# EAGLE board ctia_alone (EAGLE 7.2.0)
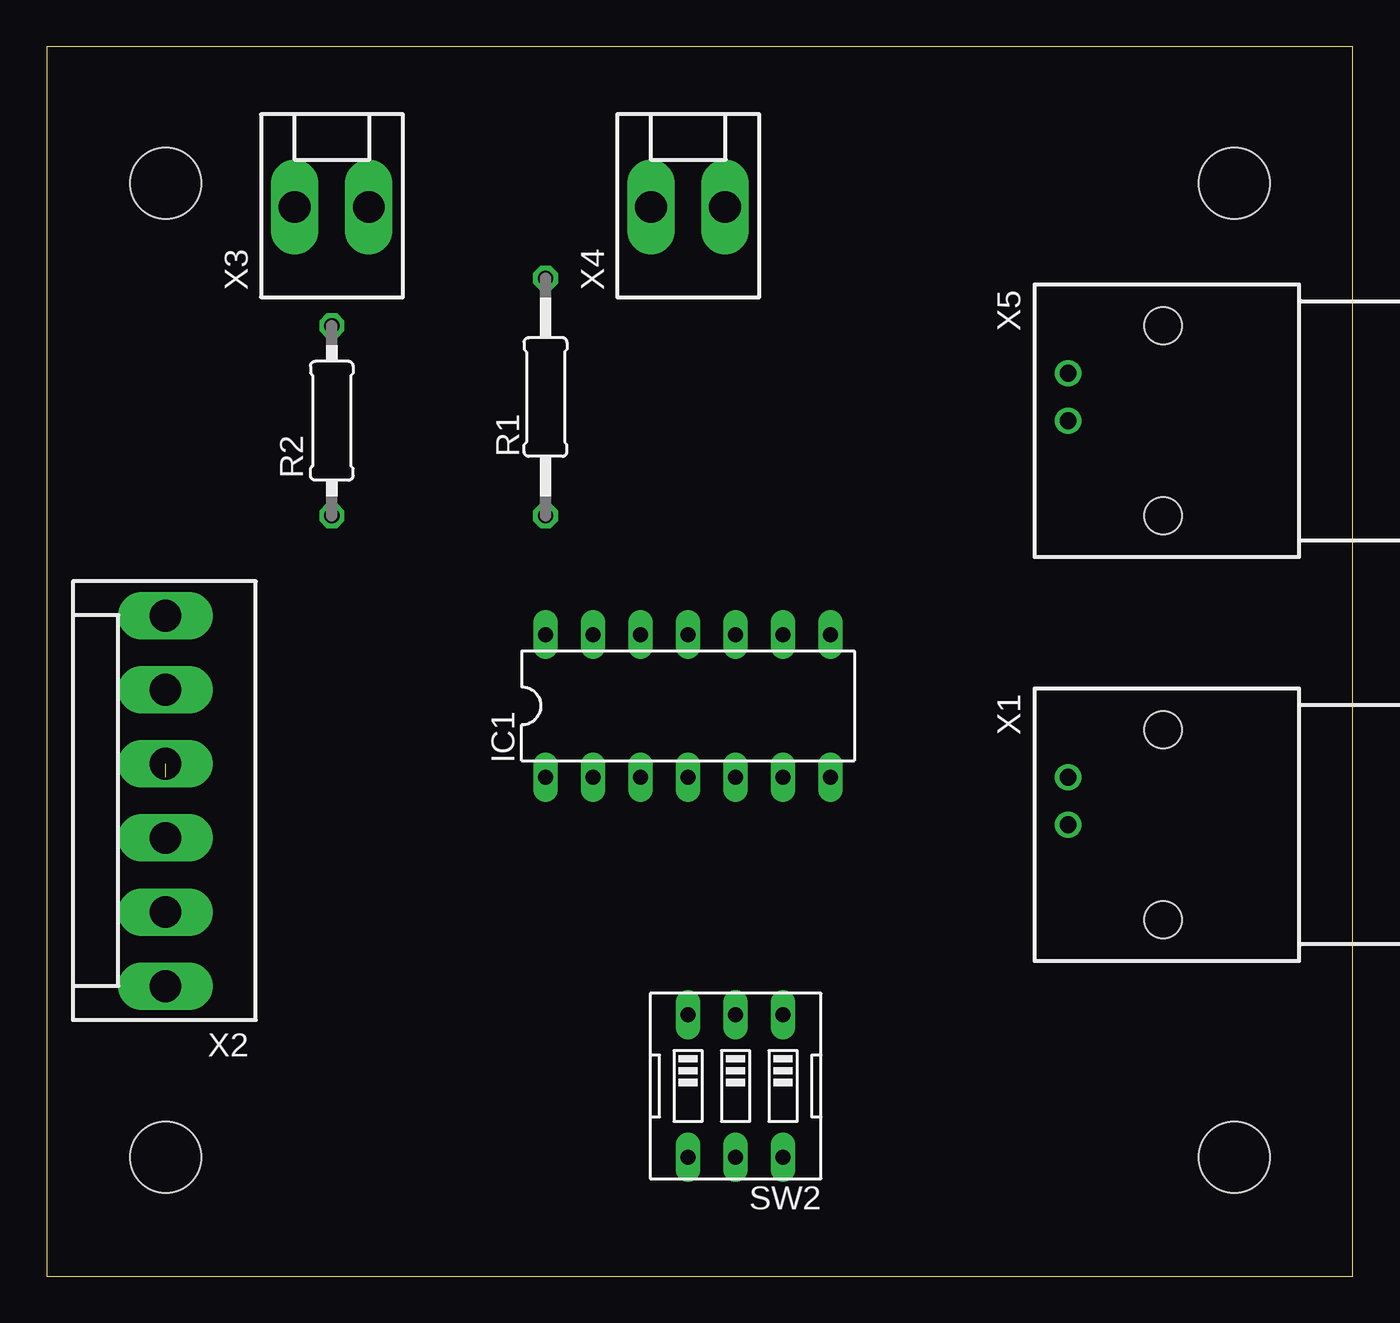
[diagram p0: board, top side]
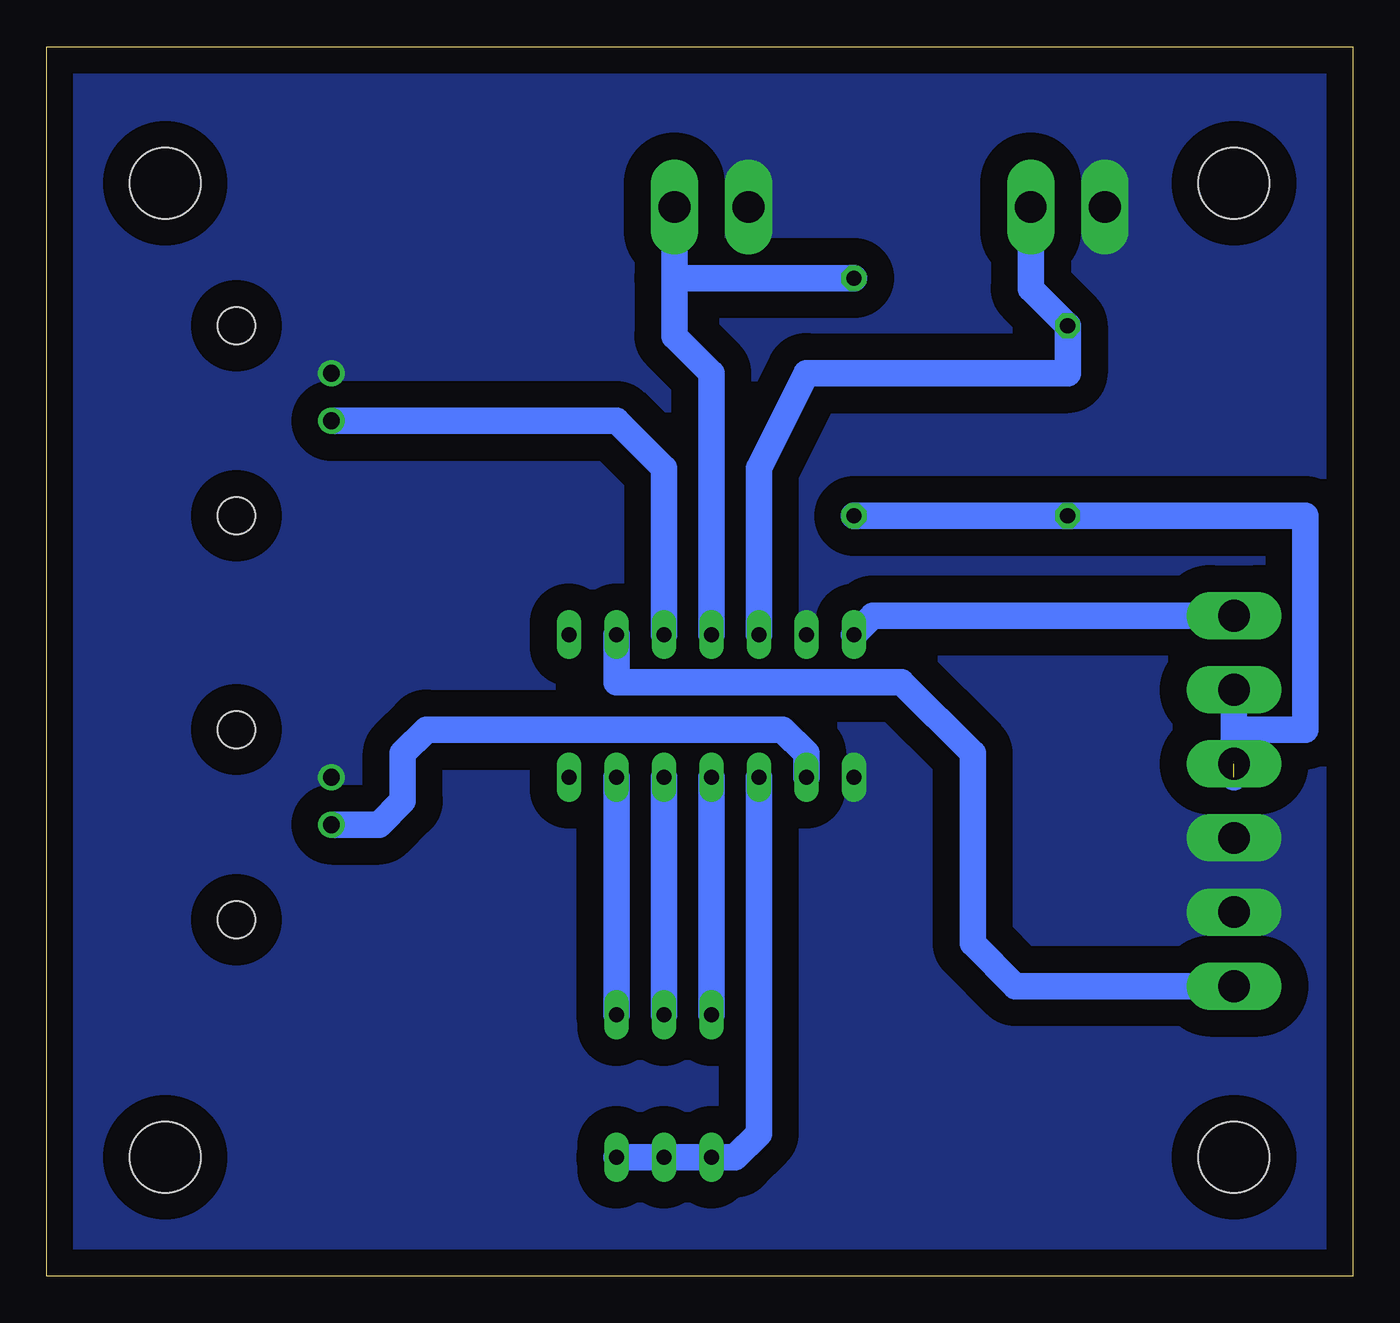
[diagram p1: board, bottom side, seen from below]

Size 69.83 x 65.71 mm. Coordinates in mm from the lower left corner, seen from the top.
Outline: 0,0 69.83,0 69.83,65.71 0,65.71 0,0
Copper layers (1*16): Top 0.035mm / dielectric 1.5mm / Bottom 0.035mm
Design rules "default": minimum track width 10mil, minimum drill 24mil, track to track 8mil, track to pad 8mil, pad to pad 8mil, via to via 8mil, smd to smd 8mil, copper to edge 40mil, drill to drill 8mil, minimum pad ring 10mil, minimum via ring 8mil, stop-mask expansion 4mil, vias tented up to drill 0mil, thermal gap 10mil
Holes 3.8 mm at 63.5,6.35 6.35,6.35 6.35,58.42 63.5,58.42

## Footprints (pad centres in the part's own frame; a part is rotated, then mirrored left to right if it is on the bottom)
DIL14 = drill 0.813 long: 1 -7.62,-3.81; 2 -5.08,-3.81; 3 -2.54,-3.81; 4 0,-3.81; 5 2.54,-3.81; 6 5.08,-3.81; 7 7.62,-3.81; 8 7.62,3.81; 9 5.08,3.81; 10 2.54,3.81; 11 0,3.81; 12 -2.54,3.81; 13 -5.08,3.81; 14 -7.62,3.81
0207/12 = drill 0.813 octagon: 1 -6.35,0; 2 6.35,0
0207/10 = drill 0.813 octagon: 1 -5.08,0; 2 5.08,0
EDG-03 = drill 0.813 long: 1 -2.54,-3.81; 2 0,-3.81; 3 2.54,-3.81; 4 2.54,3.81; 5 0,3.81; 6 -2.54,3.81
AMP_227161 = drill 0.9 pad 1.27: 1 0,-5.08; 2 -2.54,-5.08 | hole 2: -5.08,0; 5.08,0
KK-156-6 = drill 1.7 pad 2.184 long: 1 -9.9,0; 2 -5.94,0; 3 -1.98,0; 4 1.98,0; 5 5.94,0; 6 9.9,0
KK-156-2 = drill 1.7 pad 2.184 long: 1 -1.98,0; 2 1.98,0

## Placement (x,y rotation side)
IC1  IVC102UADAPTOR  [DIL14]  34.29,30.48 0 top
R1  [0207/12]  26.67,46.99 90 top
R2  [0207/10]  15.24,45.72 90 top
SW2  [EDG-03]  36.83,10.16 180 top
X1  227161-8  [AMP_227161]  59.69,24.13 270 top
X2  [KK-156-6]  6.35,25.4 90 top
X3  [KK-156-2]  15.24,57.15 0 top
X4  [KK-156-2]  34.29,57.15 0 top
X5  227161-8  [AMP_227161]  59.69,45.72 270 top

## Library data of the parts
IC1 = burr-brown
R1 R2 = resistor
SW2 = special
X1 X5 = con-coax; OC_FARNELL: unknown; OC_NEWARK: unknown
X2-X4 = con-molex; OC_FARNELL: unknown; OC_NEWARK: unknown

## Nets
+5V: R1.1 R2.1 X2.4 X2.5
+15V: IC1.14 X2.6
-15V: IC1.9 X2.1
GND: IC1.1 IC1.13 X1.2 X2.2 X2.3 X3.1 X4.1 X5.2
N$1: IC1.6 SW2.1
N$2: IC1.5 SW2.2
N$3: IC1.4 SW2.3
N$4: IC1.3 SW2.4 SW2.5 SW2.6
N$5: IC1.2 X1.1
N$6: IC1.10 X5.1
RESET: IC1.12 R2.2 X3.2
SAMPLE: IC1.11 R1.2 X4.2

## Tracks (layer width: path | path; a pad name or v marks a point on that pad's centre or on a via)
+5V  (1 unrouted)
  Bottom 1.422: X2.5 6.35,29.21 | 6.35,29.21 6.35,26.67 | R1.1 R2.1 2.54,40.64 2.54,29.21 6.35,29.21
+15V
  Bottom 1.422: X2.6 25.66,35.3 IC1.14
-15V
  Bottom 1.422: X2.1 18.04,15.5 20.32,17.78 20.32,27.94 24.13,31.75 39.37,31.75 IC1.9
GND
  pour Bottom (isolate 1.422, no thermals): 0,66.04 69.85,66.04 69.85,0 0,0
N$1
  Bottom 1.422: SW2.1 IC1.6
N$2
  Bottom 1.422: SW2.2 IC1.5
N$3
  Bottom 1.422: SW2.3 IC1.4
N$4
  Bottom 1.422: SW2.6 SW2.5 SW2.4 33.02,6.35 31.75,7.62 IC1.3
N$5
  Bottom 1.422: IC1.2 29.21,27.94 30.48,29.21 49.53,29.21 50.8,27.94 50.8,25.4 52.07,24.13 X1.1
N$6
  Bottom 1.422: X5.1 39.37,45.72 36.83,43.18 IC1.10
RESET
  Bottom 1.422: IC1.12 31.75,43.18 29.21,48.26 15.24,48.26 R2.2 17.22,52.78 X3.2
SAMPLE
  Bottom 1.422: IC1.11 34.29,48.26 36.27,50.24 36.27,53.34 | X4.2 36.27,53.34 | R1.2 36.27,53.34